# Altium PCB STM32F103RCT6_V2.1.pcbdoc (part 2 of 3)
Units mm, origin at the board's own origin, x right, y up, seen from the top; angles counter-clockwise.
Board outline 90.04 x 74.73 mm, 2 copper layers (Top Layer, Bottom Layer); 58 components, 75 nets, 672 pads, 147 vias.
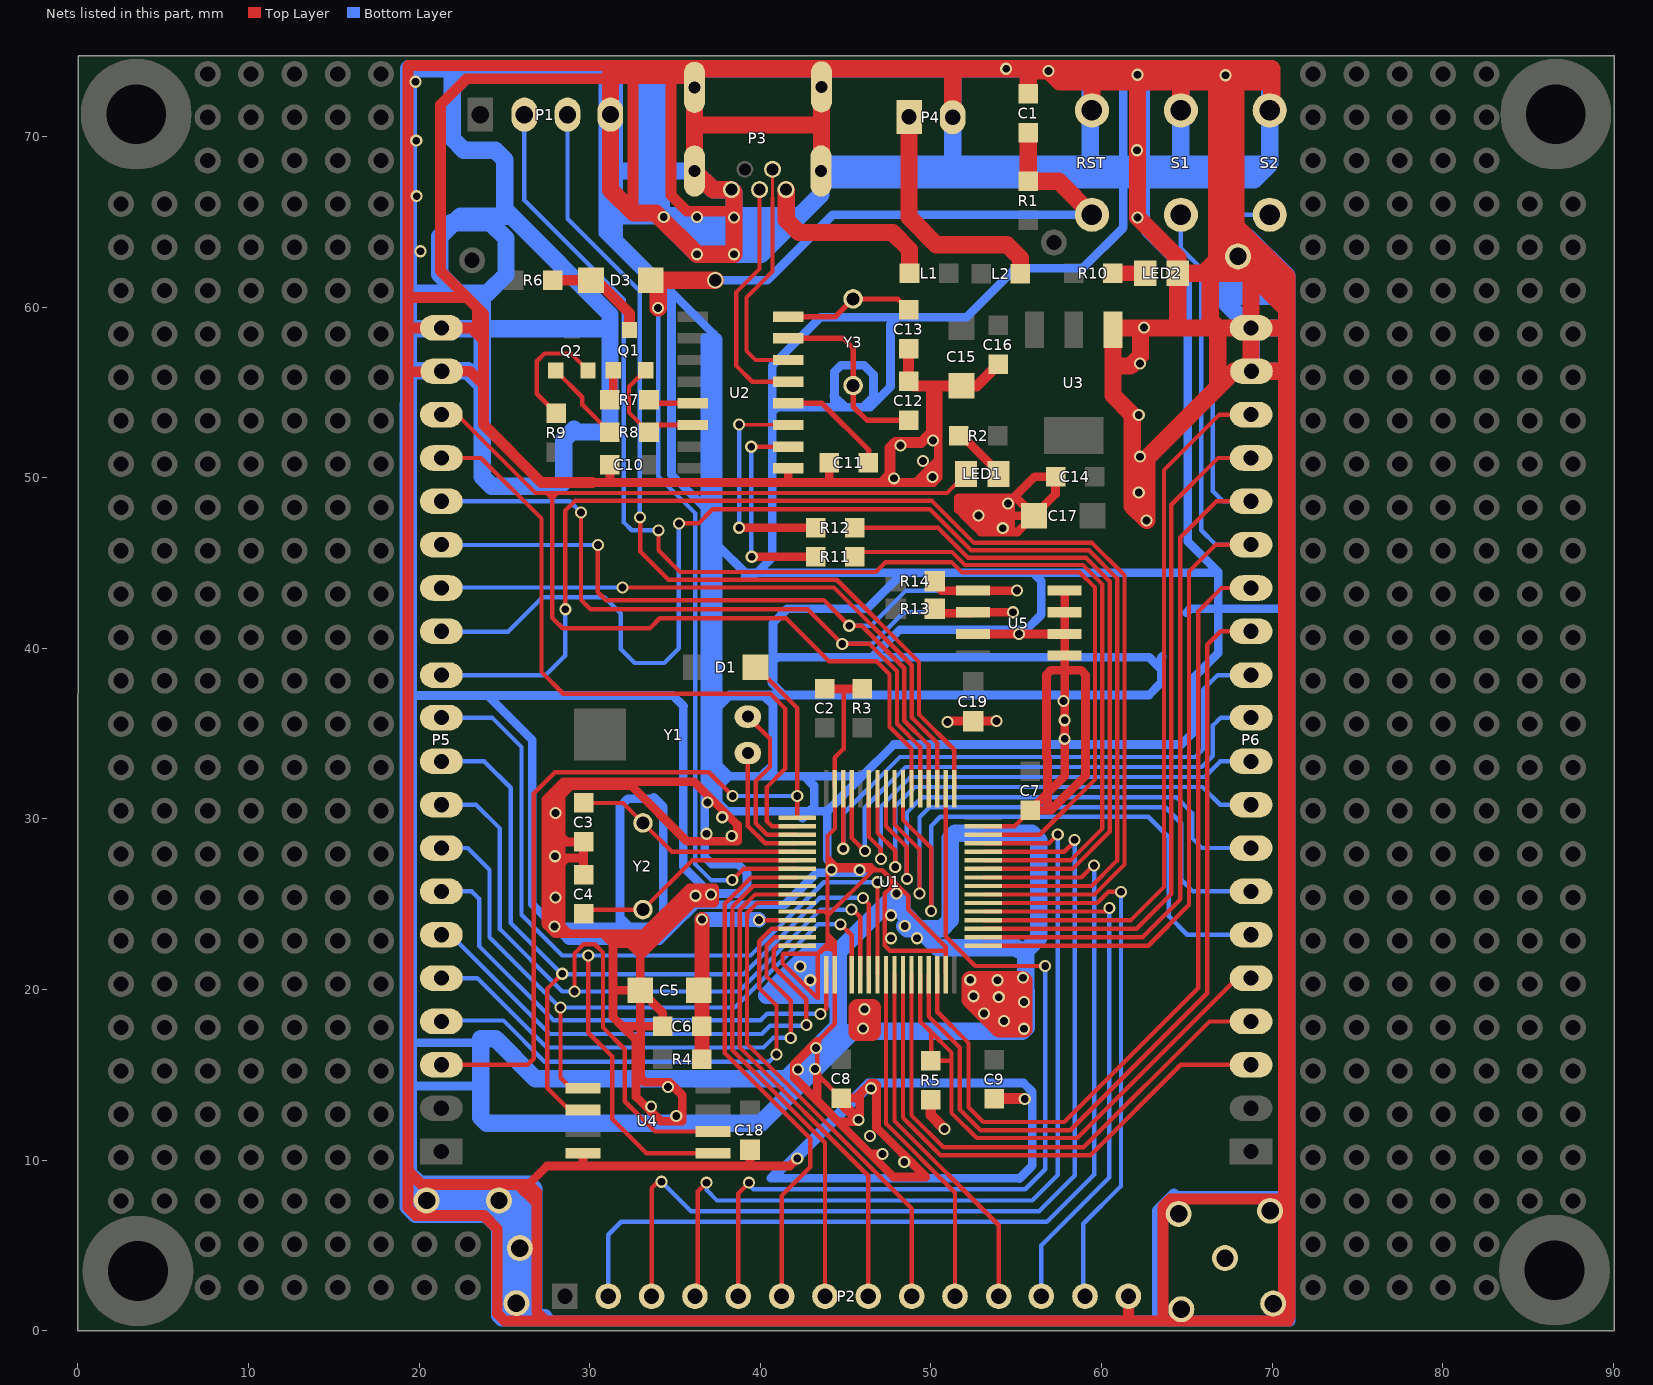
[diagram p2: the nets of this part, all layers, seen from the top]

## Via types
v1: diameter 0.711, hole 0.457, Top Layer to Bottom Layer, 132 vias
v2: diameter 0.965, hole 0.711, Top Layer to Bottom Layer, 15 vias

## Nets (pads, with @x,y where several pads share a name; then routed paths per layer and width w, separated by ;. In a path a pad name is that pad's centre, name@x,y a point inside that pad or via, vN(x,y) a via of type N, cw(c..) or ccw(c..) an arc to the next point about the centre after c; other vN are vias at no path point) (continued)
GND: C1.1 C2.2 C3.1 C4.1 C5.2 C6.2 C7.2 C8.2 C9.2 C10.2 C11.1 C12.1 C13.1 C14.2 C15.2 C16.2 C17.2 C18.1 C19.2 LED2.2 P1.4 P2.14 P3.5 P3.6 P3.7 P3.8 P3.9 P4.2 P5.19 P5.20 P6.19 P6.20 pad.0@64.516,6.858 pad.1 pad.2@70.053,1.6 pad.3 pad.4 pad.5 pad.6 pad.7 pad.8 pad.9 R3.1 R5.1 RST.1 S1.1 S2.1 U1.12 U1.18 U1.31 U1.47 U1.63 U2.1 U3.1 U4.4 U5.1 U5.2 U5.3 U5.4 U5.7 | length 2192.2
  Top Layer w0.254: U1.12@42.164,24.574 43.778,24.574 43.942,24.409 ; 43.289,22.098 41.377,22.098 41.3,22.022 41.3,21.539 43.332,19.507 43.358,19.507 43.358,22.025 43.611,22.278 43.614,22.278 43.713,22.377 ; 43.39,22.142 43.829,22.581 ; C8.2@44.729,13.64 43.332,15.037 43.332,16.967 44.364,17.999 U1.18@44.364,20.874 44.364,22.174 ; 44.806,37.617 44.882,37.541 44.882,34.112 44.364,33.594 U1.63@44.364,31.774 44.374,31.764 44.374,29.439 43.942,29.007 43.942,27.813 ; U1.31@50.864,20.874 50.864,22.276 ; U1.47@53.064,29.574 54.897,29.574 C7.2@55.829,30.505 ; 43.713,22.377 44.161,22.377 44.364,22.174 ; 43.713,22.377 43.917,22.581 ; 43.829,22.581 43.942,22.694 43.942,23.241 ; 43.829,22.581 43.917,22.581 ; 43.917,22.581 44.155,22.819 44.364,22.819 ; 43.917,22.581 44.364,22.581 ; 43.942,23.241 44.364,22.819 ; 43.942,23.241 43.942,24.333 ; 43.942,24.333 43.942,24.409 ; 43.942,24.333 46.596,26.987 ; 43.942,24.409 v1@43.942,26.987 ; v1@43.942,26.987 43.942,27.813 ; v1@43.942,26.987 v1@44.145,26.987 ; 43.942,27.813 44.145,27.61 ; v1@44.145,26.987 v1@44.399,26.987 ; v1@44.145,26.987 v1@44.145,27.153 ; v1@44.145,27.153 v1@44.399,27.153 ; v1@44.145,27.153 44.145,27.61 ; 44.145,27.61 44.399,27.356 ; 44.364,22.174 44.364,22.581 ; 44.364,22.581 44.364,22.819 ; v1@44.399,26.987 46.596,26.987 ; v1@44.399,26.987 v1@44.399,27.153 ; v1@44.399,27.153 46.457,27.153 46.513,27.096 ; v1@44.399,27.153 44.399,27.356 ; 44.399,27.356 44.475,27.28 46.513,27.28 ; 46.513,27.096 46.609,27 ; 46.513,27.096 46.513,27.28 ; 46.513,27.28 46.793,27 ; 46.596,26.987 46.609,27 ; 46.609,27 46.793,27 ; 46.793,27 47.148,27 47.65,26.498 ; 47.65,26.498 47.65,25.984 47.296,25.63 47.296,22.581 47.598,22.278 50.861,22.278 50.864,22.276 ; 47.65,26.498 48.666,25.482 48.666,24.703 50.864,22.505 50.864,22.276
  Top Layer w0.508: 26.416,8.585 27.495,9.665 29.743,9.665 ; 28.335,29.12 28.335,31.253 27.903,30.821 ; U4.4@29.606,10.414 29.606,9.802 29.743,9.665 ; C4.1@29.642,26.721 29.642,27.711 ; 30.162,49.721 31.293,49.721 ; C10.2@31.191,50.749 31.191,49.822 31.293,49.721 ; C18.1@39.395,10.617 39.395,9.716 39.345,9.665 ; U2.1@41.631,50.546 41.631,49.721 ; v1(42.164,10.109) 41.719,9.665 39.345,9.665 ; v1@43.332,15.037 43.332,13.493 ; 43.332,16.967 41.988,15.623 41.988,14.838 43.332,13.493 ; C2.2@43.79,37.617 44.806,37.617 45.949,37.617 R3.1@45.974,37.643 ; C11.1@44.044,50.876 44.044,49.746 44.018,49.721 ; C8.2@44.729,13.386 44.996,13.652 45.606,13.652 45.822,13.868 ; v1(47.168,10.363) 46.463,10.363 ; 50.495,55.377 50.419,55.301 50.419,51.029 ; v1(50.978,35.687) 51.029,35.738 C19.2@52.476,35.738 v1(53.848,35.738) v1@53.899,35.687 ; U5.7@52.469,40.843 v1(55.152,40.843) U5.2@57.836,40.843 ; v1(52.781,47.777) 53.391,47.777 ; 56.896,30.759 56.832,30.823 56.832,31.509 ; U5.4@57.836,43.383 U5.3@57.836,42.113 U5.2@57.836,40.843 ; 27.432,30.35 27.432,31.14 28.473,32.182 36.119,32.182 38.659,29.642 38.659,28.702 35.687,28.702 32.448,31.941 28.891,31.941 28.218,31.267 27.661,31.267 27.903,31.025 27.903,30.821 ; 27.432,30.35 27.903,30.821 ; 27.432,30.35 27.432,23.825 27.991,23.266 ; 27.903,30.821 27.903,24.141 27.991,24.054 ; 27.991,23.266 28.778,23.266 ; 27.991,23.266 27.991,24.054 ; 27.991,24.054 v1(27.991,25.4) 27.991,27.051 28.335,27.395 ; 27.991,24.054 28.335,23.709 ; 28.335,23.709 28.778,23.266 ; 28.335,23.709 28.335,27.395 ; 28.335,27.395 28.651,27.711 29.642,27.711 ; 28.335,27.395 28.335,28.967 28.651,28.651 C3.1@29.642,28.651 29.642,27.711 ; 28.778,23.266 30.785,23.266 ; 29.743,9.665 39.345,9.665 ; 30.785,23.266 31.369,22.682 ; 30.785,23.266 31.75,23.266 ; 31.293,49.721 41.631,49.721 ; 31.369,19.914 31.42,19.964 C5.2@32.974,19.964 ; 31.369,19.914 31.369,18.39 31.902,17.856 ; 31.369,19.914 31.369,22.682 ; 31.369,22.682 31.369,22.885 31.75,23.266 ; 31.369,22.682 32.334,22.682 ; 31.75,23.266 33.147,23.266 35.839,25.959 37.313,25.959 v1@37.313,25.629 ; 31.75,23.266 32.067,22.949 ; 31.902,17.856 32.995,17.856 ; 31.902,17.856 32.715,17.043 32.715,13.741 34.163,12.294 35.433,12.294 35.433,13.813 34.669,14.577 33.226,14.577 32.995,14.808 32.995,17.856 ; 32.067,22.949 33.337,22.949 35.789,25.4 ; 32.067,22.949 32.334,22.682 ; 32.334,22.682 33.071,22.682 33.376,22.377 ; 32.334,22.682 32.654,22.362 ; 32.654,22.362 33.36,22.362 ; 32.654,22.362 32.974,22.042 32.974,21.976 ; C5.2@32.974,19.964 34.29,18.649 C6.2@34.29,17.856 32.995,17.856 ; C5.2@32.974,19.964 32.974,17.877 32.995,17.856 ; C5.2@32.974,19.964 32.974,21.976 ; 32.974,21.976 33.36,22.362 ; 33.36,22.362 33.376,22.377 ; 33.376,22.377 36.068,25.07 37.287,25.07 37.313,25.095 ; 35.789,25.4 36.017,25.629 v1@37.313,25.629 ; 35.789,25.4 37.008,25.4 37.313,25.095 ; 37.313,25.095 v1@37.313,25.629 ; 41.631,49.721 44.018,49.721 ; 43.332,13.493 43.691,13.135 44.577,12.249 ; 44.018,49.721 49.111,49.721 ; 44.577,12.249 45.624,12.249 v1(45.745,12.37) 45.822,12.446 45.822,13.868 ; 44.577,12.249 46.463,10.363 ; 45.822,13.868 46.457,14.503 46.729,14.503 46.805,14.427 46.805,11.917 49.694,9.028 49.682,9.017 47.809,9.017 46.463,10.363 ; 49.111,49.721 50.152,49.721 50.419,49.987 50.419,50.368 ; 49.111,49.721 49.428,50.038 ; 49.428,50.038 v1(50.089,50.038) 50.419,50.368 ; 49.428,50.038 50.419,51.029 ; 50.419,50.368 50.419,51.029 ; 51.613,48.133 51.613,48.489 ; 51.613,48.133 52.057,47.688 ; 51.613,48.133 54.458,48.133 v1@54.661,48.336 ; 51.613,48.489 v1(54.508,48.489) v1@54.661,48.336 ; 51.613,48.489 51.613,48.819 54.839,48.819 ; 52.057,47.688 52.413,47.333 ; 52.057,47.688 53.302,47.688 53.391,47.777 ; 52.413,47.333 52.934,46.812 54.661,46.812 ; 52.413,47.333 53.061,47.333 ; 53.061,47.333 53.276,47.117 54.661,47.117 ; 53.061,47.333 54.597,47.333 54.661,47.396 ; 53.391,47.777 54.661,47.777 ; 54.661,46.812 55.072,46.812 C17.2@56.037,47.777 ; 54.661,46.812 54.661,47.117 ; 54.661,47.117 54.661,47.396 ; 54.661,47.396 54.661,47.777 ; 54.661,47.777 C17.2@56.037,47.777 ; 54.661,47.777 v1@54.661,48.336 ; v1@54.661,48.336 54.661,48.641 54.839,48.819 ; 54.839,48.819 56.083,50.063 C14.2@57.302,50.063 57.302,49.042 C17.2@56.037,47.777 ; 54.839,48.819 54.996,48.819 C17.2@56.037,47.777 ; 56.832,31.509 56.832,33.542 56.769,33.605 56.769,38.456 57.023,38.71 57.836,38.71 ; 56.832,31.509 C7.2@55.829,30.505 57.02,30.505 59.055,32.54 59.055,38.456 58.801,38.71 57.836,38.71 ; 56.832,31.509 57.836,32.512 v1(57.836,35.789) 57.836,38.71 ; 57.836,38.71 U5.1@57.836,39.573 U5.2@57.836,40.843
  Top Layer w0.635: 30.162,49.721 27.165,49.721 23.774,53.111 23.774,55.448 ; 32.588,65.507 32.537,65.557 32.537,73.381 ; 34.646,74.155 19.38,74.155 19.355,74.13 19.355,60.554 ; P3.7@36.144,72.873 35.636,73.381 34.773,73.381 ; 38.456,65.608 35.712,65.608 34.773,66.548 34.773,73.381 ; C8.2@44.729,13.64 44.729,13.386 v1(45.745,12.37) ; 47.193,49.759 47.6,50.165 47.6,51.74 47.93,52.07 49.428,52.07 50.013,52.654 50.013,55.377 ; C13.1@48.692,57.556 C12.1@48.692,55.651 48.966,55.377 50.013,55.377 ; R5.1@49.987,13.538 49.987,12.649 v1(50.8,11.836) v1@50.825,11.836 ; C9.2@53.721,13.614 55.474,13.614 v1(55.499,13.589) ; C16.2@53.95,56.642 52.685,55.377 C15.2@51.791,55.377 50.495,55.377 50.013,55.377 ; P2.14@61.57,2.032 61.57,0.572 ; 70.841,7.772 70.79,7.722 64.033,7.722 63.602,7.29 63.602,0.572 ; 70.968,0.572 63.602,0.572 ; 19.355,9.373 20.142,8.585 25.806,8.585 ; 19.355,9.373 19.355,7.214 19.812,6.756 23.8,6.756 24.587,5.969 24.587,1.016 25.032,0.572 27.445,0.572 ; 19.355,9.373 19.355,56.21 ; 19.355,56.21 21.31,56.21 P5.19@21.336,56.236 22.987,56.236 23.774,55.448 ; 19.355,56.21 19.355,58.776 ; 19.355,58.776 P5.20@21.311,58.776 23.063,58.776 23.419,58.42 ; 19.355,58.776 19.355,60.554 ; 19.355,60.554 22.809,60.554 ; 22.809,60.554 21.26,62.103 21.26,71.857 22.784,73.381 31.217,73.381 32.537,73.381 ; 22.809,60.554 23.419,59.944 ; 23.419,58.42 23.419,59.944 ; 23.419,58.42 23.774,58.064 ; 23.419,59.944 23.774,59.588 23.774,58.064 ; 23.774,55.448 23.774,58.064 ; 25.806,8.585 26.899,7.493 ; 25.806,8.585 26.416,8.585 26.899,8.103 26.899,7.493 ; 26.899,7.493 26.899,1.118 27.445,0.572 ; 27.445,0.572 61.57,0.572 ; 32.537,73.381 34.773,73.381 ; 61.57,0.572 63.602,0.572
  Top Layer w1.016: 32.537,65.557 31.217,66.878 P1.4@31.217,71.272 31.217,73.381 31.217,73.939 31.242,73.965 51.181,73.965 ; 32.588,65.507 33.884,65.507 v1(36.297,63.094) v1(38.456,63.094) v1(38.456,65.253) 38.456,65.608 38.456,66.726 P3.5@38.303,66.878 37.237,66.878 P3.6@36.144,67.971 ; P3.6@36.144,67.971 36.144,70.663 ; P3.7@36.144,72.873 36.144,70.663 ; P3.8@43.561,67.971 43.586,67.996 43.586,70.409 ; P3.9@43.586,72.898 43.586,70.409 ; 45.677,18.923 45.702,18.948 46.551,18.948 46.551,17.501 45.677,17.501 45.677,18.872 45.702,18.847 v1(46.101,18.847) ; P4.2@51.267,71.12 51.267,73.879 51.181,73.965 ; v1@55.27,20.574 v1(52.299,20.574) v1@52.299,19.406 ; v1@55.397,20.574 55.448,20.523 55.448,19.812 ; C1.1@55.702,72.492 55.702,73.838 ; RST.1@59.436,71.526 59.436,73.203 ; v1@61.925,49.022 61.798,49.149 ; v1(62.103,73.609) 62.103,73.203 ; S1.1@64.643,71.526 64.643,73.203 ; S2.1@69.85,71.526 69.977,71.653 69.977,73.304 ; 70.841,0.864 70.841,7.772 70.841,56.058 ; 36.144,70.663 43.332,70.663 43.586,70.409 ; 51.181,73.965 55.829,73.965 ; v1@52.299,19.406 52.705,19.812 55.448,19.812 ; v1@52.299,19.406 52.667,19.037 ; 52.667,19.037 v1(53.111,18.593) 53.48,18.224 ; 52.667,19.037 v1@55.207,19.037 ; 53.48,18.224 53.67,18.415 54.585,18.415 v1@55.207,19.037 ; 53.48,18.224 54,17.704 v1(55.448,17.704) v1(55.448,19.279) ; v1@55.207,19.037 v1(55.448,19.279) ; v1(55.448,19.279) 55.448,19.812 ; 55.702,73.838 55.829,73.965 ; 55.702,73.838 v1(56.896,73.838) 57.531,73.203 59.436,73.203 ; 55.829,73.965 59.385,73.965 ; 59.385,73.965 59.436,73.914 59.436,73.203 ; 59.385,73.965 64.872,73.965 ; 59.436,73.203 62.103,73.203 ; 60.669,56.54 61.671,56.54 62.281,57.15 v1@62.281,58.776 ; 60.669,56.54 60.669,54.825 61.798,53.696 61.798,49.149 ; 60.669,56.54 U3.1@60.669,58.675 60.77,58.776 v1@62.281,58.776 ; 61.798,49.149 61.798,48.336 v1(62.636,47.498) 62.636,51.13 66.802,55.296 ; 62.103,73.203 v1(62.103,65.253) 64.46,62.895 LED2.2@64.46,61.976 ; 62.103,73.203 64.643,73.203 ; v1@62.281,58.776 64.465,58.776 ; LED2.2@64.46,61.976 65.964,61.976 ; LED2.2@64.46,61.976 64.46,58.781 64.465,58.776 ; 64.465,58.776 66.802,58.776 ; 64.643,73.203 64.643,73.736 64.872,73.965 ; 64.643,73.203 66.751,73.203 ; 64.872,73.965 67.869,73.965 ; 65.964,61.976 66.358,62.37 ; 65.964,61.976 66.358,61.976 ; 66.358,61.976 66.358,59.22 66.802,58.776 ; 66.358,61.976 66.358,62.37 ; 66.358,61.976 68.224,61.976 ; 66.358,62.37 66.751,62.763 66.751,64.491 ; 66.751,64.491 66.751,73.203 ; 66.751,64.491 67.31,63.932 ; 66.751,73.203 67.31,73.203 ; 66.802,55.296 66.802,58.776 ; 66.802,55.296 67.742,56.236 P6.19@68.783,56.236 ; 66.802,58.776 P6.20@68.758,58.776 ; 67.31,63.932 67.31,62.89 pad.9@67.831,62.37 ; 67.31,63.932 67.31,73.203 ; 67.31,63.932 69.266,61.976 ; 67.31,73.203 67.869,73.203 ; pad.9@67.831,62.37 68.339,62.37 68.732,61.976 ; pad.9@67.831,62.37 68.224,61.976 ; 67.869,73.203 69.875,73.203 69.977,73.304 ; 67.869,73.203 67.869,64.745 70.637,61.976 ; 67.869,73.203 67.869,73.965 ; 67.869,73.965 69.977,73.965 69.977,73.304 ; 68.224,61.976 68.732,61.976 ; 68.732,61.976 69.266,61.976 ; 68.732,61.976 68.758,61.951 ; P6.20@68.758,58.776 70.841,58.776 ; P6.20@68.758,58.776 68.758,61.951 ; P6.20@68.758,58.776 68.758,56.261 P6.19@68.783,56.236 ; 68.758,61.951 70.841,59.868 ; P6.19@68.783,56.236 70.663,56.236 70.841,56.058 ; 69.266,61.976 69.52,61.976 ; 69.52,61.976 70.841,60.655 ; 69.52,61.976 70.637,61.976 ; 70.637,61.976 70.841,61.773 70.841,60.655 ; 70.841,56.058 70.841,58.776 ; 70.841,58.776 70.841,59.868 ; 70.841,59.868 70.841,60.655
  Bottom Layer w0.508: 19.375,14.351 23.47,14.351 23.622,14.199 ; 19.375,16.891 23.393,16.891 23.622,17.12 ; 19.375,37.236 24.028,37.236 ; 30.505,73.965 30.785,73.685 30.785,64.287 31.217,63.856 ; 31.166,73.965 31.217,73.914 ; 31.775,24.816 31.775,24.242 ; 35.712,25.07 34.325,23.683 ; 36.754,58.217 36.754,48.235 ; 36.982,58.166 37.262,57.887 ; 37.262,46.457 37.262,46.279 ; 37.541,33.401 37.541,33.147 ; 39.091,44.145 39.522,44.145 39.802,44.425 ; 40.97,39.421 41.021,39.472 46.561,39.472 ; v1(42.164,10.109) v1@46.584,14.529 ; 42.469,30.048 42.875,30.455 ; 44.323,54.788 44.348,54.762 ; 61.265,73.965 61.265,68.377 61.265,67.462 61.265,64.643 58.903,62.281 54.963,62.281 52.093,59.411 48.057,59.411 ; 62.586,73.787 62.586,68.377 62.586,67.462 62.586,64.364 65.049,61.9 65.049,46.253 66.827,44.475 ; 63.551,39.522 63.5,39.472 63.5,38.76 ; 64.973,42.088 65.202,42.316 66.827,42.316 ; 70.841,42.316 66.827,42.316 ; 24.028,37.236 26.645,34.62 26.645,24.994 v1(27.94,23.698) v1@27.955,23.683 ; 24.028,37.236 34.874,37.236 35.509,36.601 35.484,36.576 35.484,27.203 v1@37.059,25.629 ; v1@27.955,23.683 28.377,23.261 ; v1@27.955,23.683 31.775,23.683 ; 28.377,23.261 34.493,23.261 ; 28.377,23.261 28.778,22.86 34.092,22.86 34.493,23.261 ; 31.217,63.856 34.798,60.274 34.798,50.19 36.754,48.235 ; 31.217,63.856 31.217,64.465 ; 31.217,64.465 31.699,63.983 ; 31.217,64.465 31.217,68.123 P1.4@31.217,71.272 31.217,73.914 ; 31.217,73.914 31.699,73.431 31.699,67.971 31.699,65.354 31.699,63.983 ; 31.699,63.983 37.262,58.42 ; 31.775,23.683 31.775,24.242 ; 31.775,23.683 32.334,23.683 ; 31.775,24.242 32.334,23.683 ; 31.775,24.242 31.775,30.734 32.233,31.191 33.68,31.191 33.757,31.267 34.315,30.709 34.315,24.191 33.807,23.683 ; 32.334,23.683 33.807,23.683 ; 33.807,23.683 34.325,23.683 ; 34.325,23.683 34.915,23.683 ; 34.493,23.261 34.915,23.683 ; 34.915,23.683 36.213,24.981 36.512,24.981 ; 36.512,24.981 41.44,24.981 43.307,26.848 46.025,26.848 46.025,27.178 44.374,27.178 43.917,27.635 43.917,30.455 ; 36.512,24.981 v1(37.109,25.578) v1@37.059,25.629 ; 36.754,31.471 36.83,31.471 37.262,31.902 ; 36.754,31.471 36.754,48.235 ; 36.754,31.471 36.754,27.762 37.16,27.356 38.684,27.356 39.218,26.822 39.218,26.111 38.735,25.629 v1@37.059,25.629 ; 37.262,31.902 37.262,31.242 37.541,30.963 ; 37.262,31.902 37.541,31.902 ; 37.262,31.902 37.262,46.279 ; 37.262,46.279 37.541,45.999 ; 37.262,46.279 37.262,57.887 ; 37.262,57.887 37.262,58.42 ; 37.262,58.42 37.541,58.141 37.541,45.999 ; 37.541,30.963 38.049,30.455 42.875,30.455 ; 37.541,30.963 37.541,31.902 ; 37.541,31.902 37.567,31.902 38.176,32.512 ; 37.541,31.902 37.541,32.512 ; 37.541,32.512 37.541,33.147 ; 37.541,32.512 38.176,32.512 ; 37.541,33.147 38.176,32.512 ; 37.541,33.147 37.541,36.576 ; 37.541,36.576 38.151,37.186 ; 37.541,36.576 37.541,37.186 ; 37.541,37.186 38.151,37.186 ; 37.541,37.186 37.541,45.999 ; 37.541,45.999 39.116,44.425 39.802,44.425 ; 38.151,37.186 40.234,37.186 ; 38.151,37.186 38.227,37.262 40.31,37.262 ; 38.176,32.512 40.056,32.512 ; 39.802,44.425 40.691,45.314 40.691,53.823 ; 39.802,44.425 48.362,44.425 ; 40.056,32.512 40.742,33.198 ; 40.056,32.512 40.742,32.512 ; 40.234,37.186 40.742,36.678 40.742,33.198 ; 40.234,37.186 40.31,37.262 ; 40.31,37.262 41.377,37.262 ; 40.691,53.823 40.996,54.127 44.348,54.127 ; 40.691,53.823 40.691,56.566 43.536,59.411 48.057,59.411 ; 40.742,32.512 42.57,32.512 ; 40.742,32.512 40.742,33.198 ; 41.377,37.262 40.665,37.973 40.742,38.049 40.742,41.478 41.58,42.316 46.253,42.316 48.362,44.425 ; 41.377,37.262 62.773,37.262 63.398,37.887 63.398,37.897 63.5,37.998 63.5,38.76 ; 42.57,32.512 43.104,31.979 43.155,31.979 43.155,30.734 42.875,30.455 ; 42.57,32.512 45.771,32.512 45.872,32.41 ; 42.875,30.455 43.917,30.455 ; 43.917,30.455 45.872,32.41 ; 44.348,54.127 44.348,54.762 ; 44.348,54.127 44.983,54.127 ; 44.348,54.762 44.348,56.21 44.729,56.591 46.076,56.591 46.634,56.032 46.634,54.737 46.025,54.127 ; 44.348,54.762 44.983,54.127 ; 44.983,54.127 46.025,54.127 ; 45.872,32.41 47.828,34.366 64.668,34.366 65.278,34.976 65.278,38.176 66.827,39.726 66.827,42.316 ; 46.025,54.127 46.431,54.127 47.625,55.321 47.625,58.979 48.057,59.411 ; 46.561,39.472 48.187,41.097 55.601,41.097 56.464,41.961 56.464,43.942 55.982,44.425 ; 46.561,39.472 62.789,39.472 63.5,38.76 ; v1@46.584,14.529 46.316,14.529 41.109,9.322 40.996,9.322 40.615,8.941 55.143,8.941 55.169,8.915 55.931,9.677 55.931,14.021 55.423,14.529 v1@46.584,14.529 ; 48.362,44.425 55.982,44.425 ; 55.982,44.425 66.777,44.425 66.827,44.475 ; 66.827,42.316 66.827,44.475
  Bottom Layer w0.635: 27.35,0.762 27.54,0.572 61.646,0.572 ; P2.14@61.57,2.032 61.57,0.648 61.646,0.572 ; 70.841,7.874 64.389,7.874 64.237,8.026 63.271,7.061 63.271,0.572 ; 71.044,0.572 63.271,0.572 ; 61.646,0.572 63.271,0.572
  Bottom Layer w1.016: 21.666,64.745 21.869,64.948 22.047,64.948 ; 27.35,0.762 26.441,0.762 ; 31.217,68.123 31.369,67.971 31.699,67.971 33.325,67.971 ; 31.699,65.354 33.503,65.354 ; v1(34.341,65.278) v1@34.265,65.354 ; P3.6@36.144,67.971 P3.7@36.144,72.873 ; 40.653,63.691 40.589,63.627 ; P3.9@43.586,72.898 P3.8@43.586,67.996 ; v1(48.463,23.724) 48.616,23.571 49.301,23.571 ; 55.093,22.352 54.991,22.454 50.419,22.454 49.301,23.571 ; 70.282,61.265 67.754,63.792 ; 70.714,56.337 70.612,56.236 P6.19@68.783,56.236 68.783,58.751 P6.20@68.758,58.776 ; 70.841,0.775 70.841,7.874 70.841,42.316 70.841,58.75 ; 19.375,7.27 19.903,7.798 pad.6@24.994,7.798 ; 19.375,7.27 19.812,6.833 23.952,6.833 24.714,6.071 24.714,0.914 24.867,0.762 26.441,0.762 ; 19.375,7.27 19.375,9.251 ; 19.375,9.251 20.041,8.585 24.994,8.585 ; 19.375,9.251 19.375,14.351 19.375,16.891 19.375,37.236 19.375,54.29 19.38,54.296 19.38,56.261 ; 19.38,56.261 19.38,58.725 ; 19.38,56.261 22.86,56.261 23.698,55.423 ; 19.38,58.725 23.698,58.725 ; 19.38,58.725 19.38,60.757 ; 19.38,60.757 19.431,60.808 22.327,60.808 ; 19.38,60.757 19.38,73.965 21.844,73.965 ; 21.844,73.965 21.946,73.863 21.946,72.822 ; 21.844,73.965 23.089,73.965 ; 21.946,72.822 21.946,69.875 22.631,69.19 24.46,69.19 25.019,68.631 25.019,65.735 25.425,65.329 ; 21.946,72.822 23.089,73.965 ; 22.047,64.948 24.181,64.948 25.095,64.033 25.095,61.9 24.003,60.808 23.444,60.808 ; 22.047,64.948 21.209,64.11 21.209,61.925 22.327,60.808 ; 22.047,64.948 22.428,65.329 25.425,65.329 ; 22.327,60.808 23.444,60.808 ; 23.089,73.965 30.505,73.965 31.166,73.965 33.325,73.965 ; 23.444,60.808 23.698,60.554 23.698,58.725 ; 23.698,55.423 23.698,50.063 24.257,49.505 28.219,49.505 28.473,49.759 28.473,52.222 29.083,52.832 29.235,52.68 30.709,52.68 31.191,53.162 31.191,58.699 ; 23.698,55.423 23.698,58.725 ; 23.698,58.725 31.166,58.725 31.191,58.699 ; pad.6@24.994,7.798 24.994,2.337 pad.7@25.705,1.626 25.781,1.702 25.781,7.798 ; pad.6@24.994,7.798 24.994,8.585 ; pad.6@24.994,7.798 25.781,7.798 ; 24.994,8.585 26.467,8.585 26.721,8.331 26.721,7.798 ; 25.425,65.329 31.191,59.563 31.191,58.699 ; 25.781,7.798 26.721,7.798 ; 26.441,0.762 26.721,1.041 26.721,7.798 ; 33.325,67.971 33.325,65.532 33.503,65.354 ; 33.325,67.971 33.325,73.965 ; 33.325,67.971 34.188,67.971 ; 33.325,73.965 34.188,73.965 ; 33.503,65.354 v1@34.036,65.354 ; v1@34.036,65.354 34.912,64.478 ; v1@34.036,65.354 v1@34.265,65.354 ; 34.188,67.971 34.188,65.43 v1@34.265,65.354 ; 34.188,67.971 34.188,73.965 ; 34.188,67.971 P3.6@36.144,67.971 37.237,66.878 P3.5@38.303,66.878 38.456,66.726 v1@38.456,65.354 ; 34.188,73.965 50.952,73.965 ; v1@34.265,65.354 v1@38.354,65.354 ; 34.912,64.478 35.763,63.627 ; 34.912,64.478 38.443,64.478 ; 35.763,63.627 v1(36.297,63.094) v1(38.456,63.094) ; 35.763,63.627 38.303,63.627 ; 38.303,63.627 38.456,63.779 ; 38.303,63.627 38.456,63.627 ; v1@38.354,65.354 v1(38.456,65.253) ; v1@38.354,65.354 v1@38.456,65.354 ; 38.443,64.478 38.456,64.491 ; 38.443,64.478 38.456,64.478 ; v1(38.456,63.094) 40.056,63.094 40.589,63.627 ; v1(38.456,63.094) 38.456,63.627 ; 38.456,63.627 40.589,63.627 ; 38.456,63.627 38.456,63.779 ; 38.456,63.779 38.456,64.478 ; 38.456,64.478 38.456,64.491 ; 38.456,64.478 41.11,64.478 41.275,64.313 ; 38.456,64.491 v1(38.456,65.253) ; v1(38.456,65.253) v1@38.456,65.354 ; v1@38.456,65.354 42.316,65.354 ; 40.589,63.627 41.275,64.313 ; 41.024,20.317 40.364,19.656 44.021,19.656 44.577,19.101 ; 41.024,20.317 41.685,20.977 ; 41.024,20.317 44.504,20.317 44.577,20.244 ; 41.275,64.313 42.316,65.354 ; 41.685,20.977 42.421,21.714 ; 41.685,20.977 44.574,20.977 ; 42.316,65.354 43.561,66.598 P3.8@43.561,67.971 ; 42.421,21.714 43.837,21.714 44.574,20.977 ; 42.421,21.714 42.933,22.225 44.577,22.225 ; P3.8@43.561,67.971 P3.8@43.586,67.996 ; P3.8@43.561,67.971 44.069,67.462 51.435,67.462 ; P3.8@43.586,67.996 43.966,68.377 51.267,68.377 ; 44.574,20.977 44.577,20.98 ; 44.577,19.101 44.577,17.856 41.504,14.783 26.822,14.783 24.486,17.12 23.622,17.12 23.622,14.199 23.622,12.522 23.978,12.167 40.03,12.167 v1(43.205,15.342) 45.415,17.551 55.347,17.551 55.575,17.78 55.575,19.914 55.55,19.939 55.55,22.276 56.312,23.038 56.312,28.753 55.905,29.159 51.41,29.159 51.13,28.88 51.13,24.079 50.622,23.571 49.301,23.571 ; 44.577,19.101 44.577,20.244 ; 44.577,20.244 44.577,20.98 ; 44.577,20.98 44.577,22.225 ; 44.577,22.225 v1(47.981,25.629) 48.285,25.324 48.285,24.587 49.301,23.571 ; 50.952,73.965 51.267,73.65 P4.2@51.267,71.12 51.267,68.377 ; 50.952,73.965 59.334,73.965 ; 51.267,68.377 59.334,68.377 ; 51.267,68.377 51.267,67.63 51.435,67.462 ; 51.435,67.462 59.614,67.462 ; 59.334,68.377 61.265,68.377 62.586,68.377 64.643,68.377 ; 59.334,68.377 59.334,67.742 59.614,67.462 ; 59.334,68.377 59.334,73.965 ; 59.334,73.965 61.265,73.965 64.643,73.965 ; 59.614,67.462 61.265,67.462 62.586,67.462 64.77,67.462 ; 64.643,68.377 69.85,68.377 ; 64.643,68.377 64.643,67.589 64.77,67.462 ; 64.643,68.377 S1.1@64.643,71.526 64.643,73.965 ; 64.643,73.965 69.799,73.965 69.85,73.914 S2.1@69.85,71.526 69.85,68.377 ; 64.77,67.462 68.936,67.462 69.85,68.377 ; 67.361,60.173 P6.20@68.758,58.776 ; 67.361,60.173 67.818,60.63 68.809,60.63 ; 67.361,60.173 pad.9@67.361,62.865 ; pad.9@67.361,62.865 pad.9@67.754,62.471 ; pad.9@67.361,62.865 67.361,63.703 67.754,64.097 ; pad.9@67.754,62.471 69.596,60.63 ; pad.9@67.754,62.471 67.754,61.684 68.809,60.63 ; pad.9@67.754,62.471 67.754,63.792 ; 67.754,63.792 67.754,64.097 ; 67.754,64.097 68.567,64.097 70.841,61.824 70.841,60.63 ; P6.20@68.758,58.776 70.815,58.776 70.841,58.75 ; 68.809,60.63 69.596,60.63 ; 69.596,60.63 70.841,60.63 ; 70.841,58.75 70.841,60.63
  other v1: 48.438,9.906 46.431,11.43 35.077,12.598 33.604,13.157 46.482,14.224 34.595,14.3 42.215,15.316 43.256,16.586 46.025,17.729 54.28,18.161 53.975,19.558 52.502,19.609 42.926,20.549 53.899,20.549 55.397,20.701 42.342,21.361 47.65,23.012 49.174,23.012 47.65,24.359 36.195,25.502 45.822,27 44.171,27.026 27.965,27.813 38.329,29.007 36.855,29.134 37.77,30.099 27.991,30.353 36.906,30.963 57.836,34.696 57.76,36.906 54.204,47.041 62.179,49.124 47.828,49.962 49.53,50.978 62.255,51.232 48.209,51.892 50.114,52.172 62.179,53.67 62.255,56.693 62.484,58.801 20.091,63.271 36.297,65.278 19.863,66.497 62.078,69.19 19.837,69.748 19.787,73.203 67.259,73.584 54.407,73.965
IIC_SCL: P5.16 R13.2 U1.53 U5.6 | length 56.6
  Top Layer w0.254: v1(29.489,47.955) 29.489,42.85 30.048,42.291 42.774,42.291 v1(44.806,40.259) 46.403,40.259 48.006,38.656 48.006,35.582 49.364,34.224 U1.53@49.364,31.774
  Top Layer w0.508: R13.2@50.267,42.062 52.418,42.062 U5.6@52.469,42.113 v1(54.813,42.113)
  Bottom Layer w0.254: P5.16@21.311,48.616 28.829,48.616 v1(29.489,47.955) ; v1(44.806,40.259) 46.558,40.259 48.412,42.113 v1(54.813,42.113)
IIC_SDA: P5.15 R14.2 U1.52 U5.5 | length 55
  Top Layer w0.254: v1(30.48,46.05) 30.48,43.282 30.937,42.824 43.713,42.824 v1(45.212,41.326) 45.946,41.326 48.438,38.834 48.438,35.761 49.864,34.335 U1.52@49.864,31.774
  Top Layer w0.508: R14.2@50.267,43.739 50.622,43.383 U5.5@52.469,43.383 v1(55.042,43.383)
  Bottom Layer w0.254: P5.15@21.311,46.076 21.336,46.05 v1(30.48,46.05) ; v1(45.212,41.326) 46.482,41.326 48.539,43.383 v1(55.042,43.383)
LCD_CS: P2.2 U1.41 | length 58.5
  Top Layer w0.254: U1.41@53.064,26.574 58.806,26.574 v1@59.588,27.356
  Bottom Layer w0.254: P2.2@31.09,2.032 31.09,5.639 31.852,6.401 56.794,6.401 59.563,9.169 v1(59.563,27.28)
LCD_D0: P2.6 U1.8 | length 30.6
  Top Layer w0.254: P2.6@41.25,2.032 41.25,7.925 42.926,9.601 42.926,11.278 37.922,16.281 37.922,24.716 37.922,25.022 39.474,26.574 U1.8@42.164,26.574
LCD_D1: P2.7 U1.9 | length 29.4
  Top Layer w0.254: U1.9@42.164,26.074 39.584,26.074 38.368,24.858 38.368,24.551 38.354,24.537 38.354,16.46 43.79,11.025 P2.7@43.79,2.032
LCD_D2: P2.8 U1.10 | length 29.5
  Top Layer w0.254: U1.10@42.164,25.574 39.695,25.574 38.8,24.679 38.8,24.373 38.786,24.358 38.786,16.639 46.33,9.095 P2.8@46.33,2.032
LCD_D3: P2.9 U1.11 | length 29.6
  Top Layer w0.254: U1.11@42.164,25.074 39.806,25.074 39.232,24.5 39.232,24.194 39.218,24.179 39.218,16.818 48.87,7.166 P2.9@48.87,2.032
LCD_D4: P2.10 U1.24 | length 20.5
  Top Layer w0.254: U1.24@47.364,20.874 47.364,12.148 51.41,8.103 P2.10@51.41,2.032
LCD_D5: P2.11 U1.25 | length 21.4
  Top Layer w0.254: U1.25@47.864,20.874 47.864,12.309 53.975,6.198 P2.11@53.975,2.032
LCD_D6: P2.12 U1.37 | length 31.7
  Top Layer w0.254: U1.37@53.064,24.574 v1@60.337,24.574
  Bottom Layer w0.254: P2.12@56.465,2.032 56.465,5.004 60.452,8.992 v1(60.452,24.79)
LCD_D7: P2.13 U1.38 | length 33
  Top Layer w0.254: U1.38@53.064,25.074 59.745,25.074 60.401,25.73 v1(61.138,25.73)
  Bottom Layer w0.254: P2.13@59.03,2.032 58.928,2.134 58.928,6.274 61.138,8.484 v1(61.138,25.73)
LCD_RD: P2.5 U1.50 | length 52.1
  Top Layer w0.254: P2.5@38.71,2.032 38.71,8.052 v1(39.345,8.687) ; U1.50@50.864,31.774 50.864,23.116 52.593,21.387 v1(56.693,21.387)
  Bottom Layer w0.254: v1(39.345,8.687) 39.345,8.56 39.599,8.306 55.524,8.306 56.693,9.474 v1(56.693,21.387)
LCD_RS: P2.3 U1.44 | length 58.2
  Top Layer w0.254: P2.3@33.63,2.032 33.63,8.357 34.011,8.738 v1(34.214,8.738) ; U1.44@53.064,28.074 57.817,28.074 v1@58.471,28.727
  Bottom Layer w0.254: v1(34.214,8.738) 35.941,7.01 56.337,7.01 58.42,9.093 v1(58.42,28.778)
LCD_WR: P2.4 U1.45 | length 53.4
  Top Layer w0.254: P2.4@36.17,2.032 36.335,2.197 36.335,8.166 v1(36.855,8.687) ; U1.45@53.064,28.574 56.92,28.574 v1(57.429,29.083) v1@57.506,29.159
  Bottom Layer w0.254: v1(36.855,8.687) 36.855,8.255 37.465,7.645 55.931,7.645 57.429,9.144 v1(57.429,29.083)
NetC3_2: C3.2 U1.5 Y2.2 | length 16
  Top Layer w0.254: C3.2@29.642,30.937 31.953,30.937 Y2.2@33.122,29.769 ; 34.715,28.175 Y2.2@33.122,29.769 ; U1.5@42.164,28.074 34.817,28.074 Y2.2@33.122,29.769
NetC4_2: C4.2 U1.6 Y2.1 | length 13.8
  Top Layer w0.254: C4.2@29.642,24.435 29.896,24.689 Y2.1@33.122,24.689 36.006,27.574 U1.6@42.164,27.574
NetC5_1: C5.1 C6.1 R4.2 U1.13 | length 14
  Top Layer w0.254: v1(39.929,24.074) U1.13@42.164,24.074
  Top Layer w0.889: C5.1@36.403,19.964 C5.1@36.576,19.792 ; R4.2@36.576,15.926 C6.1@36.576,17.856 C5.1@36.576,19.792 ; v1(36.576,24.105) C5.1@36.576,19.792
  Bottom Layer w0.889: v1(36.576,24.105) 39.898,24.105 v1(39.929,24.074)
NetC11_2: C11.2 U2.4 | length 6.8
  Top Layer w0.305: U2.4@41.631,54.356 43.612,54.356 46.355,51.613 C11.2@46.355,50.648
NetC12_2: C12.2 U2.7 Y3.1 | length 11
  Top Layer w0.305: U2.7@41.631,58.166 44.856,58.166 45.441,57.582 Y3.1@45.441,55.397 45.441,54.178 46.253,53.365 C12.2@48.692,53.365
NetC13_2: C13.2 U2.8 Y3.2 | length 7.8
  Top Layer w0.305: U2.8@41.631,59.436 44.399,59.436 Y3.2@45.441,60.477 48.057,60.477 C13.2@48.692,59.842
NetD3_2: D3.2 Q1.3 R6.1 | length 6.3
  Top Layer w0.635: R6.1@27.838,61.57 D3.2@30.079,61.57 30.404,61.57 32.334,59.639 Q1.3@32.334,58.649
NetL1_2: L1.2 P3.1 | length 11.1
  Top Layer w1.016: P3.1@41.504,66.878 41.529,66.853 41.529,65.1 42.266,64.364 47.752,64.364 48.743,63.373 L1.2@48.743,61.976
NetL2_2: L2.2 P4.1 | length 14.3
  Top Layer w1.016: P4.1@48.717,71.145 48.717,65.253 50.317,63.652 54.458,63.652 55.245,62.865 L2.2@55.245,61.951
NetLED1_1: LED1.1 R2.2 | length 3.3
  Top Layer w0.508: R2.2@51.638,52.451 51.825,52.451 53.95,50.326 LED1.1@53.95,50.216
NetLED2_1: LED2.1 R10.1 | length 1.9
  Top Layer w0.889: R10.1@60.655,61.976 LED2.1@62.56,61.976
NetP3_2: P3.2 U2.6 | length 13.9
  Top Layer w0.178: 40.716,66.396 40.721,66.4 40.721,68.067 P3.2@40.716,68.072
  Top Layer w0.254: 40.716,66.396 40.716,62.078 39.192,60.554 39.192,57.429 39.726,56.896 U2.6@41.631,56.896
NetP3_3: P3.3 U2.5 | length 14.3
  Top Layer w0.254: P3.3@39.954,66.878 39.954,62.23 38.583,60.858 38.583,56.566 39.522,55.626 U2.5@41.631,55.626
NetQ1_1: Q1.1 R7.1 | length 1.5
  Top Layer w0.508: R7.1@31.384,54.752 Q1.1@31.384,56.299
NetQ1_2: Q1.2 R8.2 U2.14 | length 7.3
  Top Layer w0.254: Q1.2@33.284,56.299 32.309,55.323 32.309,55.118 32.309,53.823 R8.2@33.477,52.654
  Top Layer w0.305: R8.2@33.477,52.654 33.909,53.086 U2.14@36.043,53.086
NetQ2_1: Q2.1 R8.1 | length 4.9
  Top Layer w0.254: Q2.1@28.006,56.273 29.566,54.714 29.566,54.28 R8.1@31.191,52.654
NetQ2_2: Q2.2 R9.2 | length 7.1
  Top Layer w0.254: R9.2@28.042,53.772 26.899,54.915 26.899,56.82 27.356,57.277 28.902,57.277 Q2.2@29.906,56.273
NetR7_2: R7.2 U2.13 | length 2.6
  Top Layer w0.305: R7.2@33.477,54.559 33.68,54.356 U2.13@36.043,54.356
NetR11_1: R11.1 U2.2 | length 12.4
  Top Layer w0.254: v1(39.472,51.816) U2.2@41.631,51.816
  Top Layer w0.508: v1(39.497,45.364) R11.1@43.256,45.364
  Bottom Layer w0.254: v1@39.472,45.364 v1(39.472,51.816)
NetR12_1: R12.1 U2.3 | length 13.4
  Top Layer w0.254: v1(38.76,53.111) U2.3@41.631,53.086
  Top Layer w0.508: v1(38.76,47.066) R12.1@43.256,47.066
  Bottom Layer w0.254: v1@38.76,47.092 v1(38.76,53.111)
NetU1_3: U1.3 Y1.1 | length 9.8
  Top Layer w0.254: Y1.1@39.268,35.992 40.564,34.696 40.564,33.045 39.726,32.207 39.726,29.744 40.396,29.074 U1.3@42.164,29.074
NetU1_4: U1.4 Y1.2 | length 7.6
  Top Layer w0.254: Y1.2@39.268,33.858 39.268,29.591 40.286,28.574 U1.4@42.164,28.574
NRST: C1.2 D3.1 R1.2 RST.2 U1.7 | length 76.8
  Top Layer w0.254: v1(38.354,26.416) 39.012,27.074 U1.7@42.164,27.074
  Top Layer w1.016: v1(34.011,59.944) 34.011,61.138 D3.1@33.579,61.57 v2(37.363,61.57) ; C1.2@55.702,70.206 R1.2@55.702,67.361 57.48,67.361 RST.2@59.436,65.405
  Bottom Layer w0.254: v1(34.011,59.944) 34.011,50.089 36.195,47.904 36.195,27.33 37.109,26.416 v1(38.354,26.416)
  Bottom Layer w0.508: v2(37.363,61.57) 40.411,61.57 44.247,65.405 RST.2@59.436,65.405
PA0: P5.4 U1.14 | length 30.4
  Top Layer w0.254: v1(40.945,16.205) 40.945,19.075 39.929,20.091 39.929,22.835 40.668,23.574 U1.14@42.164,23.574
  Bottom Layer w0.254: P5.4@21.311,18.136 21.361,18.186 24.943,18.186 27.356,15.773 40.513,15.773 v1(40.945,16.205)
PA1: P5.5 U1.15 | length 30.4
  Top Layer w0.254: v1(41.783,17.17) 41.783,19.355 40.361,20.777 40.361,22.606 40.828,23.074 U1.15@42.164,23.074
  Bottom Layer w0.254: P5.5@21.311,20.676 23.419,20.676 27.483,16.612 40.183,16.612 40.742,17.17 v1(41.783,17.17)
PA2: P5.6 U1.16 | length 31.2
  Top Layer w0.254: U1.16@42.164,22.574 41.014,22.574 40.792,22.352 40.792,21.336 42.697,19.431 v1(42.697,17.932)
  Bottom Layer w0.254: P5.6@21.869,23.216 P5.6@21.311,23.216 21.844,23.216 27.661,17.399 40.081,17.399 40.564,17.882 v1@42.697,17.882
PA3: P5.7 U1.17 | length 30
  Top Layer w0.254: v1(43.536,18.567) 43.864,18.896 U1.17@43.864,20.874
  Bottom Layer w0.254: P5.7@21.742,25.756 P5.7@21.311,25.756 23.089,25.756 23.52,25.324 23.52,22.555 27.864,18.212 40.03,18.212 40.411,18.593 v1@43.536,18.593
PA4: P5.8 U1.20 U4.1 | length 40.5
  Top Layer w0.254: v1(28.296,18.948) 28.296,14.834 28.905,14.224 U4.1@29.606,14.224 ; v1@44.704,23.851 45.364,23.191 U1.20@45.364,20.874
  Bottom Layer w0.254: P5.8@21.311,28.296 22.86,28.296 24.13,27.026 24.13,23.063 28.245,18.948 v1(28.296,18.948) 38.506,18.948 43.383,23.825 v1(44.704,23.825)
PA5: P5.9 U1.21 U4.6 | length 58.2
  Top Layer w0.254: v1(29.108,19.888) 29.108,22.123 29.642,22.657 30.302,22.657 30.785,22.174 30.785,17.78 32.055,16.51 32.055,13.462 33.833,11.684 U4.6@37.226,11.684 ; v1@45.364,24.74 45.864,24.24 U1.21@45.864,20.874
  Bottom Layer w0.254: P5.9@21.946,30.836 P5.9@21.311,30.836 23.343,30.836 24.74,29.439 24.74,23.546 28.397,19.888 v1(29.108,19.888) 38.735,19.888 43.536,24.689 v1(45.339,24.689)
PA6: P5.10 U1.22 U4.2 | length 50.7
  Top Layer w0.254: v1(28.397,20.93) 27.508,20.041 27.508,14.249 28.804,12.954 U4.2@29.606,12.954 ; v1@46.025,25.349 46.364,25.01 U1.22@46.364,20.874
  Bottom Layer w0.254: P5.10@21.311,33.376 23.825,33.376 25.375,31.826 25.375,23.901 28.372,20.904 39.014,20.904 43.485,25.375 v1(46.025,25.375)
PA7: P5.11 U1.23 U4.5 | length 61.2
  Top Layer w0.254: v1(29.921,21.996) 29.921,17.475 31.318,16.078 31.318,12.421 33.325,10.414 U4.5@37.226,10.414 ; U1.23@46.864,20.874 v1(46.863,26.289)
  Bottom Layer w0.254: P5.11@21.311,35.941 24.283,35.941 26.01,34.214 26.01,24.384 28.397,21.996 v1(29.921,21.996) 39.421,21.996 43.713,26.289 v1(46.863,26.289)
PA9: R12.2 U1.42 | length 39.2
  Top Layer w0.254: R12.2@45.542,47.066 50.417,47.066 52.169,45.314 59.083,45.314 60.477,43.919 60.477,29.26 58.291,27.074 U1.42@53.064,27.074
PA10: R11.2 U1.43 | length 37.5
  Top Layer w0.254: R11.2@45.542,45.364 45.822,45.644 51.229,45.644 51.991,44.882 58.904,44.882 60.046,43.74 60.046,29.439 58.181,27.574 U1.43@53.064,27.574
PA13: P1.2 U1.46 | length 75.8
  Top Layer w0.254: v1(34.036,46.914) 34.036,45.745 35.331,44.45 ; 35.331,44.475 46.761,44.475 47.32,45.034 51.228,45.034 51.812,44.45 58.725,44.45 59.614,43.561 59.614,32.309 56.379,29.074 U1.46@53.064,29.074
  Bottom Layer w0.254: P1.2@26.177,71.272 26.177,66.254 32.004,60.427 32.004,47.371 32.461,46.914 v1(34.036,46.914)
PA14: P1.3 U1.49 | length 54.7
  Top Layer w0.254: v1@32.969,47.752 32.969,45.669 34.62,44.018 44.475,44.018 49.301,39.192 49.301,36.119 51.364,34.056 U1.49@51.364,31.774
  Bottom Layer w0.254: P1.3@28.702,71.272 28.702,65.176 32.969,60.909 32.944,60.884 v1(32.944,47.676)
PB0: P6.3 U1.26 | length 31.9
  Top Layer w0.254: U1.26@48.364,20.874 48.364,12.494 50.571,10.287 59.334,10.287 64.643,15.596 P6.3@68.758,15.596
PB1: P6.4 U1.27 | length 32
  Top Layer w0.254: U1.27@48.864,20.874 48.864,12.629 50.724,10.77 58.953,10.77 66.319,18.136 P6.4@68.758,18.136
PB2: P6.5 R5.2 U1.28 | length 33.8
  Top Layer w0.254: U1.28@49.364,20.874 49.364,18.149 50.013,17.501 ; R5.2@49.86,15.875 50.013,16.027 50.013,17.501 ; R5.2@49.987,15.824 51.181,15.824 ; P6.5@68.758,20.676 67.945,20.676 58.572,11.303 52.68,11.303 51.206,12.776 51.206,16.307 50.013,17.501
PB3: P6.6 U1.55 | length 37.4
  Top Layer w0.254: U1.55@48.364,31.774 48.364,29.944 50.013,28.296 v1(50.013,24.613)
  Bottom Layer w0.254: v1(50.013,24.613) 50.013,29.591 50.546,30.124 62.738,30.124 63.932,28.931 63.932,24.308 65.024,23.216 P6.6@68.758,23.216
PB4: P6.7 U1.56 | length 34.9
  Top Layer w0.254: U1.56@47.864,31.774 47.864,29.682 49.327,28.219 v1(49.327,25.629)
  Bottom Layer w0.254: v1(49.327,25.629) 49.327,30.099 49.911,30.683 63.729,30.683 64.668,29.743 64.668,26.441 65.354,25.756 P6.7@68.758,25.756
PB5: P6.8 U1.57 | length 32.3
  Top Layer w0.254: U1.57@47.364,31.774 47.364,29.572 48.59,28.345 v1(48.59,26.492)
  Bottom Layer w0.254: v1(48.59,26.492) 48.59,30.378 49.479,31.267 64.389,31.267 65.303,30.353 65.303,28.88 65.888,28.296 P6.8@68.758,28.296
PB6: P6.9 U1.58 | length 30.3
  Top Layer w0.254: U1.58@46.864,31.774 46.864,29.184 47.904,28.143 v1(47.904,27.178)
  Bottom Layer w0.254: v1(47.904,27.178) 47.904,30.734 49.047,31.877 65.913,31.877 66.954,30.836 P6.9@68.758,30.836
PB7: P6.10 U1.59 | length 30.3
  Top Layer w0.254: U1.59@46.364,31.774 46.364,28.947 47.066,28.245 v1(47.066,27.661)
  Bottom Layer w0.254: v1(47.066,27.661) 47.066,30.734 48.793,32.461 66.04,32.461 66.954,33.376 P6.10@68.758,33.376
PB8: P6.11 U1.61 | length 32.4
  Top Layer w0.254: U1.61@45.364,31.774 45.364,28.88 v1(46.126,28.118)
  Bottom Layer w0.254: v1(46.126,28.118) 46.126,30.658 48.514,33.045 65.863,33.045 66.523,33.705 66.523,35.484 66.979,35.941 P6.11@68.758,35.941
PB9: P6.12 U1.62 | length 34.9
  Top Layer w0.254: v1(44.864,28.252) U1.62@44.864,31.774
  Bottom Layer w0.254: v1(44.864,28.252) 44.864,30.31 48.184,33.63 65.481,33.63 65.938,34.087 65.938,37.567 66.802,38.431 P6.12@68.758,38.431
PB10: P6.13 U1.29 | length 50.3
  Top Layer w0.254: U1.29@49.864,20.874 49.864,18.437 51.689,16.612 51.689,12.979 52.908,11.76 58.166,11.76 66.192,19.787 66.192,40.208 66.98,40.996 P6.13@68.758,40.996
PB11: P6.14 U1.30 | length 51.3
  Top Layer w0.254: U1.30@50.364,20.874 50.364,18.699 52.197,16.866 52.197,13.106 53.061,12.243 57.81,12.243 65.659,20.091 65.659,42.164 67.031,43.536 P6.14@68.758,43.536
PB12: P6.15 S1.2 U1.33 | length 59.1
  Top Layer w0.254: U1.33@53.064,22.574 62.731,22.574 65.126,24.968 65.126,44.501 66.7,46.076 P6.15@68.758,46.076
  Bottom Layer w0.254: S1.2@64.643,65.405 64.643,63.449 65.837,62.255 65.837,46.914 66.675,46.076 P6.15@68.758,46.076
PB13: P6.16 S2.2 U1.34 | length 60
  Top Layer w0.254: U1.34@53.064,23.074 62.393,23.074 64.618,25.298 64.618,46.507 66.726,48.616 P6.16@68.758,48.616
  Bottom Layer w0.254: P6.16@68.758,48.616 67.107,48.616 66.523,49.2 66.523,64.262 67.666,65.405 S2.2@69.85,65.405
PB14: P6.17 U1.35 | length 40.5
  Top Layer w0.254: U1.35@53.064,23.574 62.055,23.574 64.084,25.603 64.084,48.412 66.827,51.156 P6.17@68.758,51.156
PB15: P6.18 U1.36 | length 42.3
  Top Layer w0.254: U1.36@53.064,24.074 61.716,24.074 63.652,26.01 63.652,50.444 66.904,53.696 P6.18@68.758,53.696
PC8: P5.12 U1.39 | length 77
  Top Layer w0.254: v1(28.575,42.291) 28.575,48.082 29.134,48.641 50.063,48.641 52.527,46.177 59.44,46.177 61.341,44.276 61.341,27.33 59.584,25.574 U1.39@53.064,25.574
  Bottom Layer w0.254: P5.12@21.311,38.431 27.432,38.431 28.575,39.573 v1(28.575,42.291)
PC9: P5.13 U1.40 | length 78
  Top Layer w0.254: v1@35.204,47.32 v1(35.23,47.32) 36.373,47.32 37.211,48.158 49.935,48.158 52.348,45.745 59.261,45.745 60.909,44.098 60.909,27.559 59.424,26.074 U1.40@53.064,26.074
  Bottom Layer w0.254: P5.13@21.311,40.996 21.336,40.97 25.222,40.97 27.254,43.002 30.861,43.002 31.826,42.037 31.826,39.954 32.639,39.141 34.366,39.141 35.23,40.005 v1(35.23,47.32)
PC10: P5.14 U1.51 | length 37.3
  Top Layer w0.254: v1(31.928,43.561) 44.322,43.561 48.87,39.013 48.87,35.94 50.364,34.446 U1.51@50.364,31.774
  Bottom Layer w0.254: P5.14@21.311,43.536 21.336,43.561 v1(31.928,43.561)
PC13: P5.17 U1.2 | length 40.4
  Top Layer w0.254: P5.17@21.311,51.156 23.622,51.156 27.178,47.6 27.178,38.608 28.448,37.338 40.589,37.338 41.453,36.474 41.453,32.944 40.386,31.877 40.386,29.87 40.683,29.574 U1.2@42.164,29.574
PD2: LED1.2 P5.18 U1.54 | length 70.9
  Top Layer w0.254: P5.18@21.311,53.696 22.225,53.696 26.822,49.098 27.483,49.098 ; 27.813,49.073 27.813,48.793 ; 28.854,49.098 28.118,49.098 ; U1.54@48.864,31.774 48.864,34.114 47.574,35.403 47.574,38.477 46.808,39.243 44.019,39.243 41.505,41.758 34.112,41.758 33.528,41.173 28.423,41.173 27.813,41.783 27.813,48.768 ; LED1.2@52.05,50.216 50.932,49.098 28.118,49.098 ; 27.483,49.098 27.813,48.768 ; 27.483,49.098 28.118,49.098 ; 27.813,48.768 27.813,48.793 ; 27.813,48.793 28.118,49.098
VBAT: D1.2 P5.3 U1.1 | length 47.3
  Top Layer w0.254: P5.3@21.311,15.596 26.365,15.596 26.721,15.951 26.721,31.496 27.965,32.741 36.982,32.741 v1(38.379,31.344) ; D1.2@39.72,38.456 40.208,38.456 42.164,36.5 U1.1@42.164,30.074
  Bottom Layer w0.254: v1(38.379,31.344) v1(42.164,31.344)
pads on no net: P3.4 U2.9 U2.10 U2.11 U2.12 U2.15 Y1.

## Keep-outs
Keep-Out Layer:
  lines w0.152: 0,74.717 0,0 90.043,0 90.043,74.727 0.024,74.727

## Other copper
Top Layer:
  rectangle net GND: 63.678,0.635 70.485,7.493
  region net 3.3V: 40.869,40.665 41.326,40.665 42.621,39.37 42.621,37.186 42.291,37.186 41.453,38.024 41.453,40.081
  region net GND: 47.981,52.324 49.53,52.324 49.53,52.451 49.936,52.857 50.292,52.857 50.292,51.206 48.997,49.911 48.997,49.657 47.295,49.657 47.193,49.759 47.422,49.987 47.422,51.765
  region net GND: 46.482,26.949 43.98,26.949 43.942,26.987 43.942,24.409
  region net GND: 47.65,26.498 48.666,25.482 48.666,24.703 50.861,22.508 50.861,22.278 47.598,22.278 47.296,22.581 47.296,25.63 47.65,25.984
  region net GND: 22.454,60.63 22.454,60.909 21.26,62.103 21.285,62.128 21.285,71.882 22.987,73.584 31.166,73.584 31.166,73.965 31.331,74.13 19.355,74.13 19.355,60.427
  region net GND: 32.385,73.736 32.741,73.381 34.773,73.381 34.773,66.523 35.687,65.608 38.125,65.608 38.176,65.659 38.202,65.634 38.202,63.094 36.728,63.094 34.315,65.507 32.588,65.507 32.36,65.735 32.36,73.635
  region net GND: 62.281,58.776 66.802,58.776 66.802,55.296 61.925,50.419 61.747,50.419 61.747,53.645 61.798,53.696 60.669,54.825 60.669,56.54 61.671,56.54 62.281,57.15
  region net GND: 20.193,8.534 26.162,8.534 26.213,8.585 26.975,7.823 26.975,0.673 27.076,0.572 25.032,0.572 24.587,1.016 24.587,5.969 23.724,6.833 19.736,6.833 19.355,7.214 19.355,9.373
  region net GND: 43.332,16.967 41.837,15.472 42.139,15.17 42.139,14.687 43.691,13.135 43.691,17.326
  region net GND: 45.822,13.868 46.457,14.503 46.482,14.478 46.754,14.478 46.754,11.968 49.632,9.09 47.882,9.09 47.809,9.017 44.577,12.249 45.624,12.249 45.745,12.37
  region net GND: 32.766,14.58 32.768,14.577 34.669,14.577 35.433,13.813 35.433,12.294 34.163,12.294 32.715,13.741 32.715,14.63 32.741,14.656
  region net GND: 41.42,22.142 43.332,22.142 43.332,19.507 41.3,21.539 41.3,22.022
  region net GND: 36.119,32.182 38.659,29.642 38.659,28.702 35.687,28.702 35.687,28.905 32.385,32.207 32.36,32.182
  region net GND: 57.023,38.71 58.801,38.71 59.055,38.456 59.055,32.54 58.905,32.54 56.871,30.505 56.769,30.607 56.769,38.456
Bottom Layer:
  rectangle net GND: 52.832,68.504 57.734,73.787
  rectangle net GND: 66.065,68.174 68.402,73.762
  rectangle net GND: 45.009,68.199 47.219,73.736
  region net GND: 46.316,14.529 55.423,14.529 55.931,14.021 55.931,9.677 55.88,9.677 55.143,8.941 40.728,8.941
  region net GND: 70.841,7.874 70.79,7.925 64.135,7.925 64.135,7.874 63.271,7.01 63.271,0.572 70.637,0.572 70.841,0.775
  region net GND: 42.164,14.986 41.961,14.783 26.822,14.783 26.822,15.088 24.765,17.145 24.74,17.12 23.622,17.12 23.622,12.751 24.206,12.167 39.802,12.167 39.802,12.268 43.002,15.469
  region net GND: 56.032,29.159 56.312,28.88 56.312,22.708 55.575,21.971 55.575,17.78 44.806,17.78 44.577,17.551 44.577,22.682 47.676,25.781 49.784,23.673 50.597,23.673 51.079,24.155 51.079,28.829 51.41,29.159
  region net GND: 24.308,37.363 34.747,37.363 35.484,36.627 35.484,27.102 37.211,25.375 36.817,24.981 35.496,24.981 34.315,23.8 34.315,30.709 34.163,30.709 33.68,31.191 32.233,31.191 31.852,30.81 31.979,30.683 31.979,23.673 28.372,23.673 28.296,23.597 26.899,24.994 26.645,24.994 26.645,34.62 24.359,36.906 24.359,37.262
  region net GND: 37.084,31.598 38.049,30.632 38.049,30.455 43.917,30.455 43.917,27.597 44.666,26.848 43.307,26.848 41.44,24.981 36.678,24.981 36.678,25.298 36.424,25.552 36.5,25.629 38.735,25.629 39.218,26.111 39.218,26.822 38.684,27.356 37.16,27.356 36.754,27.762 36.83,27.838 36.83,31.471
  region net GND: 34.62,60.808 34.874,60.808 37.262,58.42 37.211,58.369 37.211,47.955 34.722,50.444 34.722,60.579
  region net GND: 42.977,32.512 45.745,32.512 43.536,30.302 43.383,30.455 43.18,30.455 43.18,31.953 42.926,32.207 42.926,32.461
  region net GND: 40.361,37.313 47.447,37.313 47.828,36.932 47.828,34.366 45.872,32.41 40.843,32.41 40.742,32.512 40.742,36.678 40.234,37.186
  region net GND: 47.447,37.313 65.278,37.313 65.354,37.236 65.253,37.135 65.253,34.773 65.075,34.773 64.592,34.29 47.6,34.29
  region net GND: 56.21,44.425 56.261,44.475 66.827,44.475 66.827,39.726 65.278,38.176 65.278,36.982 65.253,36.957 62.789,36.957 62.789,37.287 63.5,37.998 63.5,38.76 62.789,39.472 62.611,39.294 46.383,39.294 48.187,41.097 48.441,40.843 55.347,40.843 56.464,41.961 56.464,43.942 55.982,44.425
  region net GND: 39.116,44.425 48.362,44.425 46.253,42.316 41.58,42.316 40.742,41.478 40.792,41.427 40.792,37.567 41.173,37.186 37.541,37.186 37.541,45.999
  region net GND: 62.535,73.965 62.535,64.364 64.999,61.9 65.049,61.9 65.049,46.126 66.751,44.425 39.802,44.425 40.691,45.314 40.691,53.416 40.996,53.721 40.996,54.127 46.507,54.127 46.609,54.026 47.625,55.042 47.625,58.979 48.057,59.411 52.093,59.411 54.963,62.281 58.903,62.281 61.265,64.643 61.265,73.889 61.493,74.117
  region net GND: 43.637,59.512 47.676,59.512 47.676,54.61 47.574,54.508 46.736,54.508 46.736,55.931 46.076,56.591 44.729,56.591 44.348,56.21 44.348,54.127 44.298,54.077 40.691,54.077 40.691,56.566
  region net GND: 25.07,65.532 31.039,59.563 31.191,59.563 31.191,52.807 31.064,52.68 28.931,52.68 28.473,52.222 28.473,49.759 24.105,49.759 23.952,49.606 23.698,49.86 23.698,58.699 23.901,58.903
  region net GND: 19.38,73.965 19.482,73.863 21.946,73.863 21.946,70.079 22.631,69.393 22.631,69.19 24.384,69.19 25.07,68.504 25.07,65.532 22.885,65.532 21.641,64.287 21.412,64.287 21.412,62.459 21.158,62.205 21.692,61.671 21.692,60.808 19.431,60.808 19.38,60.757